# Altium PCB 4k-bias-board.PcbDoc
Units mil, origin at the board's own origin, x right, y up, seen from the top; angles counter-clockwise.
Board outline 2000 x 2000 mil, 2 copper layers (Top Layer, Bottom Layer); 30 components, 37 nets, 128 pads, 8 vias.
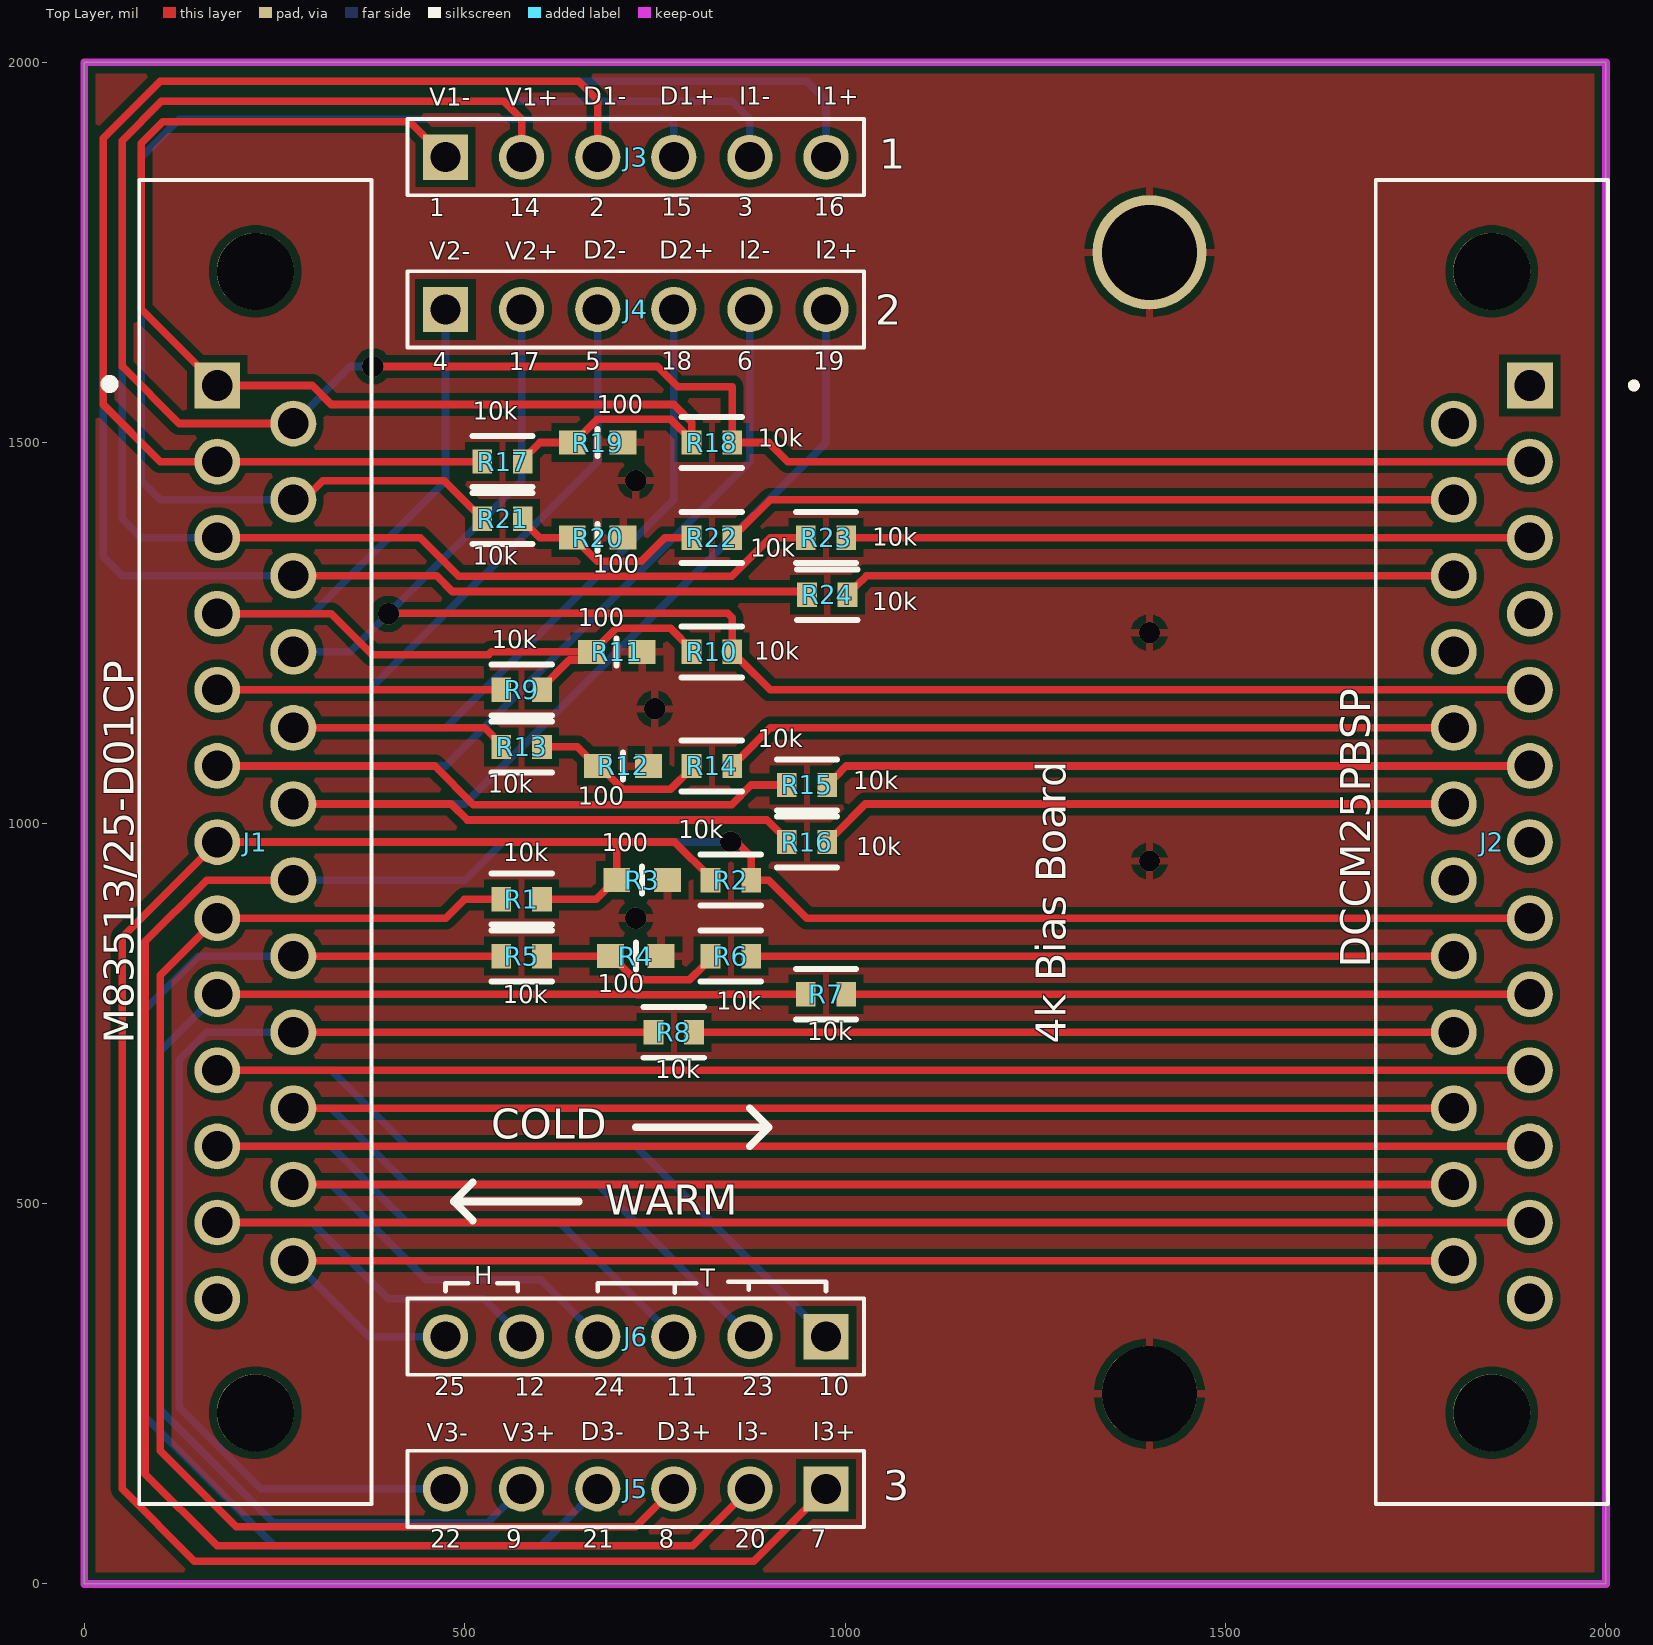
[diagram p0: Top Layer view]
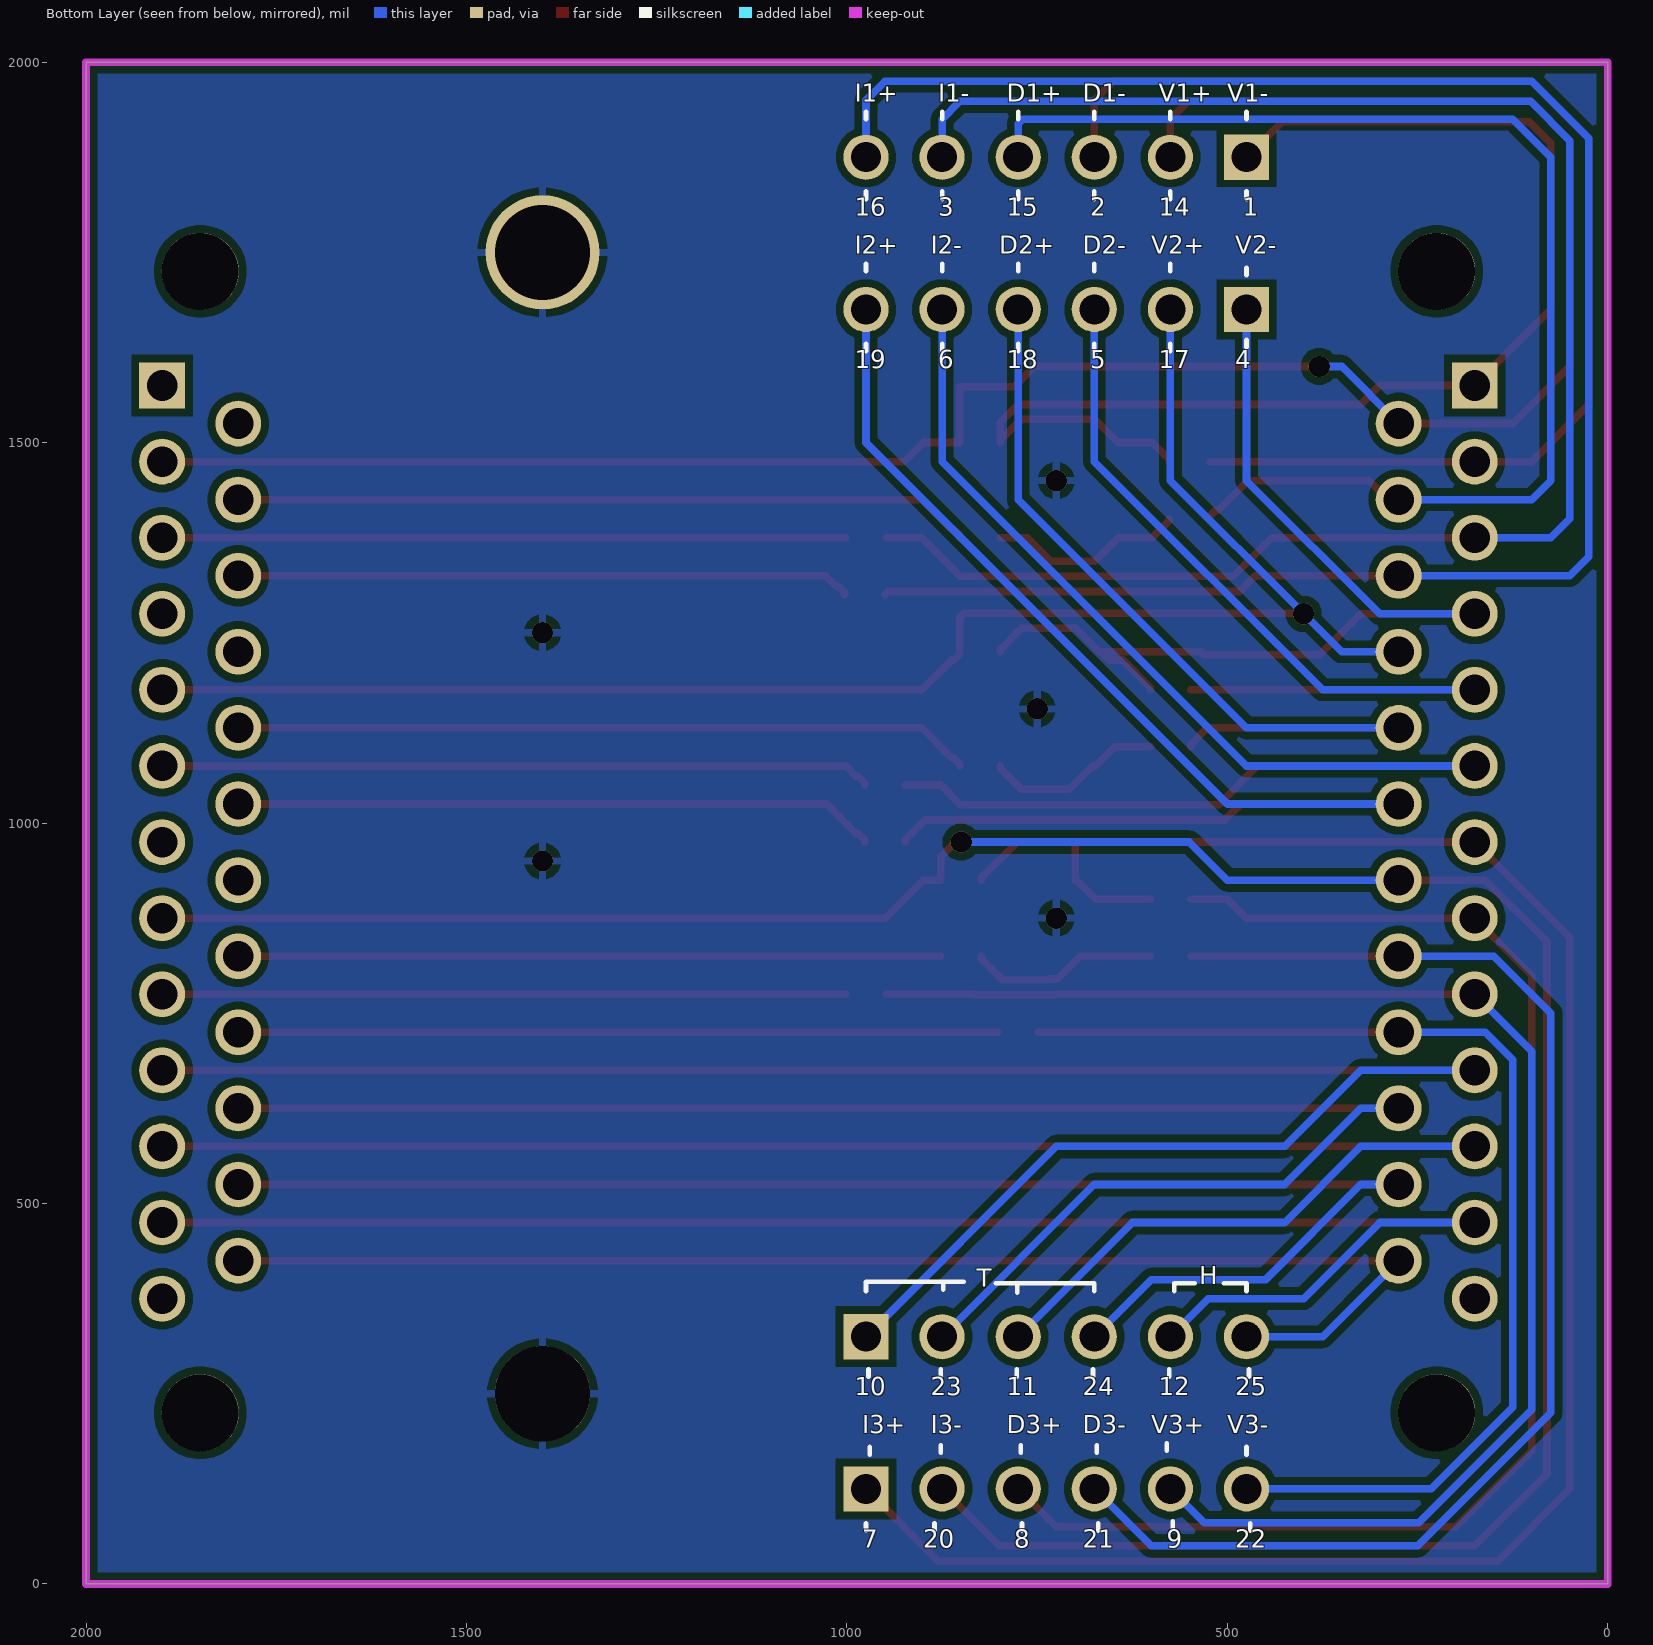
[diagram p1: Bottom Layer view, seen from below]
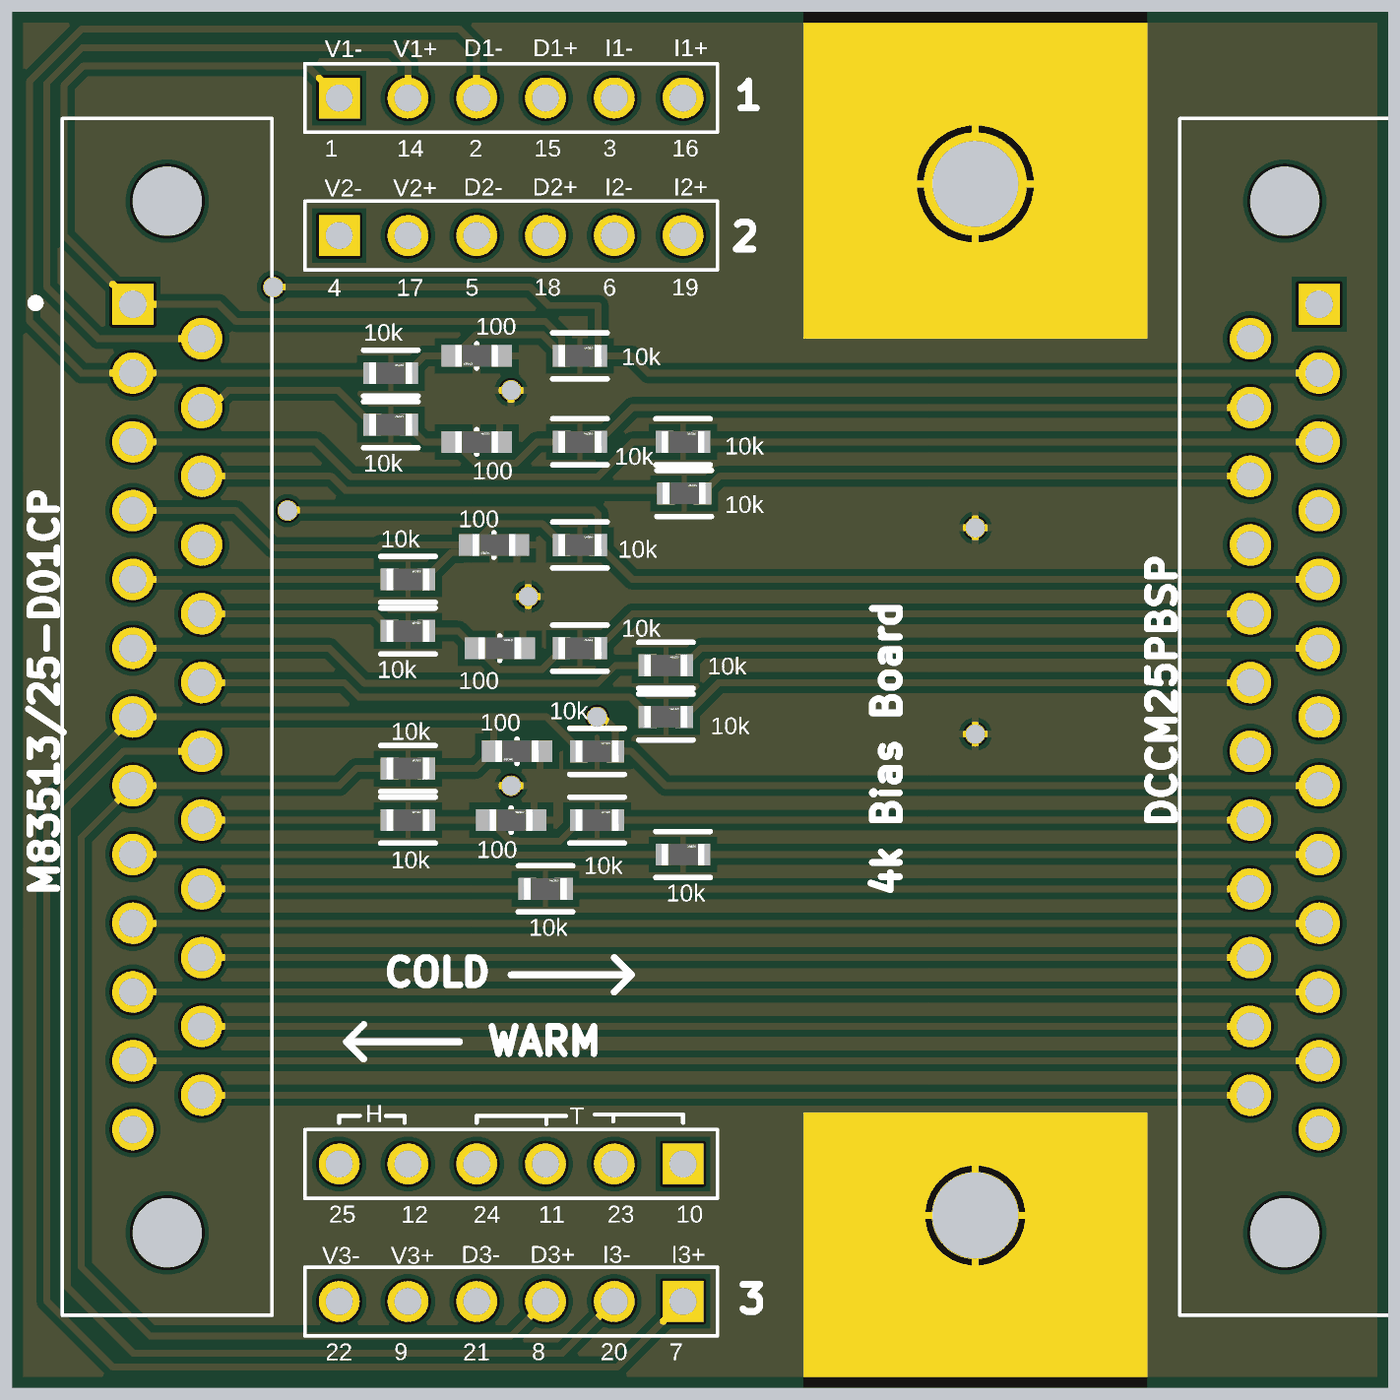
[diagram p2: 3D render of the assembled board from above, using the file's embedded part models]

## Layer stack, top to bottom
Top Solder: solder mask 0.4, Solder Resist, Dk 3.5
Top Layer: signal copper 1.4
Dielectric 1: dielectric 12.6, FR-4, Dk 4.8
Bottom Layer: signal copper 1.4
Bottom Solder: solder mask 0.4, Solder Resist, Dk 3.5

## Board outline
0,0 0,2000 2000,2000 2000,0

## Design rules (kind name [scope] priority, off if disabled: settings)
Clearance [All] p1: gap=10 ignorepadtopadclearanceinfootprint=FALSE except(0: Arc-Hole Track-Hole SMDPad-Hole THPad-Hole Via-Hole Fill-Hole Poly-Hole Region-Hole Text-Hole)
PolygonConnect [All] p1: connectstyle=Relief reliefconductorwidth=10 reliefentries=4 polygonreliefangle="90 Angle" airgapwidth=10
RoutingVias [All] p1: holewidth=28 width=50 viastyle="Through Hole" minholewidth=28 minwidth=50 maxholewidth=28 maxwidth=50
SolderMaskExpansion [All] p1: expansion=4 istentingtop=FALSE
Width [All] p1: maxlimit=10 minlimit=10 preferedwidth=10
30 further rules are at their usual default settings.

## Components (designator, comment, footprint, x,y, rotation, side; value= is the part's Value field where it differs from the comment)
J1 "M83513/25-D01CP" BEL_M83513/25-D01CP 225,975 r90 top
J2 "DCCM25PBSP" BEL_DCCM25PBSP 1850,975 r270 top
J3 "6 pos header" "6 pin header" 475,1875 r0 top
J4 "6 pos header" "6 pin header" 475,1675 r0 top
J5 "6 pos header" "6 pin header" 975,125 r180 top
J6 "6 pos header" "6 pin header" 975,325 r180 top
R1 "RC0603FR-0710KL" FP-RC0603-0_55-IPC_C 575,900 r0 top
R2 "RC0603FR-0710KL" FP-RC0603-0_55-IPC_C 850,925 r0 top
R3 "RC0603FR-07100RL" FP-RC0603-0_55-MFG 733.46,925 r180 top
R4 "RC0603FR-07100RL" FP-RC0603-0_55-MFG 725,825 r0 top
R5 "RC0603FR-0710KL" FP-RC0603-0_55-IPC_C 575,825 r0 top
R6 "RC0603FR-0710KL" FP-RC0603-0_55-IPC_C 850,825 r0 top
R7 "RC0603FR-0710KL" FP-RC0603-0_55-IPC_C 975,775 r0 top
R8 "RC0603FR-0710KL" FP-RC0603-0_55-IPC_C 775,725 r0 top
R9 "RC0603FR-0710KL" FP-RC0603-0_55-IPC_C 575,1175 r0 top
R10 "RC0603FR-0710KL" FP-RC0603-0_55-IPC_C 825,1225 r0 top
R11 "RC0603FR-07100RL" FP-RC0603-0_55-MFG 700,1225 r180 top
R12 "RC0603FR-07100RL" FP-RC0603-0_55-MFG 708.46,1075 r0 top
R13 "RC0603FR-0710KL" FP-RC0603-0_55-IPC_C 575,1100 r0 top
R14 "RC0603FR-0710KL" FP-RC0603-0_55-IPC_C 825,1075 r0 top
R15 "RC0603FR-0710KL" FP-RC0603-0_55-IPC_C 950,1050 r0 top
R16 "RC0603FR-0710KL" FP-RC0603-0_55-IPC_C 950,975 r0 top
R17 "RC0603FR-0710KL" FP-RC0603-0_55-IPC_C 550,1475 r0 top
R18 "RC0603FR-0710KL" FP-RC0603-0_55-IPC_C 825,1500 r0 top
R19 "RC0603FR-07100RL" FP-RC0603-0_55-MFG 675,1500 r180 top
R20 "RC0603FR-07100RL" FP-RC0603-0_55-MFG 675,1375 r0 top
R21 "RC0603FR-0710KL" FP-RC0603-0_55-IPC_C 550,1400 r0 top
R22 "RC0603FR-0710KL" FP-RC0603-0_55-IPC_C 825,1375 r0 top
R23 "RC0603FR-0710KL" FP-RC0603-0_55-IPC_C 975,1375 r0 top
R24 "RC0603FR-0710KL" FP-RC0603-0_55-IPC_C 976.64,1300 r0 top

## Footprints (in the part's own frame and the unit in brackets; to place one, negate y for a bottom-side part, rotate by r counter-clockwise, add the part's x,y. Pads: shape width x height; smd on the part's side, far side on the other; paste and mask are expansions set on the pad)
"6 pin header" [mm]
  rect 1.508x1.508 hole 1: 1(0,0)
  round 1.508 hole 1: 2(2.54,0) 3(5.08,0) 4(7.62,0) 5(10.16,0) 6(12.7,0)
  silkscreen extent -1.27,-1.27 13.97,1.27
BEL_DCCM25PBSP [mm]
  rect 1.53x1.53 hole 1.02: 1(-15.24,1.27)
  round 1.53 hole 1.02: 2(-12.7,1.27) 3(-10.16,1.27) 4(-7.62,1.27) 5(-5.08,1.27) 6(-2.54,1.27) 7(0,1.27) 8(2.54,1.27) 9(5.08,1.27) 10(7.62,1.27) 11(10.16,1.27) 12(12.7,1.27) 13(15.24,1.27) 14(-13.97,-1.27) 15(-11.43,-1.27) 16(-8.89,-1.27) 17(-6.35,-1.27) 18(-3.81,-1.27) 19(-1.27,-1.27) 20(1.27,-1.27) 21(3.81,-1.27) 22(6.35,-1.27) 23(8.89,-1.27) 24(11.43,-1.27) 25(13.97,-1.27)
  round 2.57 hole 2.57 unplated: ""(-19.05,0) ""(19.05,0)
  silkscreen extent -22.1,-3.88 22.1,4.84
BEL_M83513/25-D01CP [mm]
  rect 1.53x1.53 hole 1.02: 1(15.24,1.27)
  round 1.53 hole 1.02: 2(12.7,1.27) 3(10.16,1.27) 4(7.62,1.27) 5(5.08,1.27) 6(2.54,1.27) 7(0,1.27) 8(-2.54,1.27) 9(-5.08,1.27) 10(-7.62,1.27) 11(-10.16,1.27) 12(-12.7,1.27) 13(-15.24,1.27) 14(13.97,-1.27) 15(11.43,-1.27) 16(8.89,-1.27) 17(6.35,-1.27) 18(3.81,-1.27) 19(1.27,-1.27) 20(-1.27,-1.27) 21(-3.81,-1.27) 22(-6.35,-1.27) 23(-8.89,-1.27) 24(-11.43,-1.27) 25(-13.97,-1.27)
  round 2.57 hole 2.57 unplated: ""(-19.05,0) ""(19.05,0)
  silkscreen extent -22.1,-3.88 22.1,5.01
FP-RC0603-0_55-IPC_C [mil]
  rect 25.93x31.97 smd paste+0 mask+0: 1(-26.64,0) 2(26.64,0)
  silkscreen extent -40,-33 40,33, body extent -44,-22 44,22, height 10
FP-RC0603-0_55-MFG [mm]
  rect 0.9x0.8 smd paste+0 mask+0: 1(-0.85,0) 2(0.85,0)
  silkscreen extent 0,-0.45 0,0.45, body extent -1.4,-0.55 1.4,0.55, height 0.25

## Part data
J1: "MIL-DTL-83513 PCB Mounted Connector", Package=None, Availability=Unavailable, MP=M83513/25-D01CP, Price=None
J2: "Commercial PCB Mount Connector", Package=None, Check_prices=https://www.snapeda.com/parts/DCCM25PBSP/Cinch%20Connectors/view-part/4621471/?ref=eda, Digi-Key_Part_Number=116-1298-ND, MF="Cinch Connectivity Solutions", MP=DCCM25PBSP, Purchase-URL=https://pricing.snapeda.com/search/part/DCCM25PBSP/?ref=eda, SnapEDA_Link=https://www.snapeda.com/parts/DCCM25PBSP/Cinch%20Connectors/view-part/4621471/?ref=snap
J3 J4 J5 J6: "CONN HEADER VERT 6POS 2.54MM - MTA100 Series", Manufacturer_Part_Number=1755532, Supplier Part Number 1=A19433-ND, Built_By=EMA_Kyle, Copyright="Copyright (C) 2018 Accelerated Designs. All rights reserved", RefDes=RefDes, SourceLibrary=Phoenix_Contact_2018-12-18, Supplier 1=Digi-Key, Type=DEV, Vendor="Phoenix Contact"
R1 R2 R5 R6 R7 R8 R9 R10 R13 R14 R15 R16 R17 R18 R21 R22 R23 R24: library part CMP-2100-03664-2, "RES 10K OHM 1% 1/10W 0603", Case Code (Imperial)=0603, Case Code (Metric)=1608, Max Operating Temperature=155°C, Max Power Dissipation=100mW, Min Operating Temperature=-55°C, Resistance=10kR, Resistance Tolerance=1%, Resistor Type="Thick Film", Temperature Coefficient=100ppm/°C, Voltage Rating=75V, Voltage Rating (DC)=50V, Case/Package=0603, Construction=Rectangular, Depth=0.8mm, Features="Moisture Resistant", Height=0.45mm, Lead Free="Lead Free", Lead Pitch=0.3mm, Length=1.6mm, Military Standard=Not, Number of Pins=2, Number of Terminations=2, Packaging="Tape and Reel", Power Rating=100mW, RoHS Compliant=Yes, Series=RC, Size Code=0603, Termination=SMD/SMT, Tolerance=1%, Weight=7.1E-05oz, Width=0.8mm
R3 R4 R11 R12 R19 R20: library part CMP-2100-03663-2, Case Code (Imperial)=0603, Max Operating Temperature=155°C, Min Operating Temperature=-55°C, Power Rating=100mW, Resistance=100Ω, Temperature Coefficient=100ppm/°C, Tolerance=1%, Voltage Rating=50V, Case Code (Metric)=0603, Case/Package=0603, Composition="Thick Film", Depth=800µm, Height=450µm, Lead Free="Lead Free", Length=1.6mm, Military Standard=Not, NexarPartId=55402879, Number of Pins=2, Packaging="Tape & Reel", REACH SVHC=Unknown, RoHS=Compliant, Schedule B="8533210045, 8533210045", Termination=SMD/SMT, Voltage Rating (DC)=50V, Width=800µm

## Free pads (board coordinates)
  round 125 hole 125 paste-99999 mask-99999: 2(1400,250)
  round 150 hole 125: 3(1400,1750)

## Via types
v1: diameter 28, hole 28, Top Layer to Bottom Layer, 8 vias

## Nets (pads, with @x,y where several pads share a name; then routed paths per layer and width w, separated by ;. In a path a pad name is that pad's centre, name@x,y a point inside that pad or via, vN(x,y) a via of type N, cw(c..) or ccw(c..) an arc to the next point about the centre after c; other vN are vias at no path point)
GND: pad.2 pad.3 R3.1 R4.2 R11.1 R12.2 R19.1 R20.2
  other v1: 725,875 1400,950 750,1150 1400,1250 725,1450
NetJ1_1: J1.1 J3.1 R17.2 R18.1 R19.2 | length 1719
  Top Layer w10: J3.1 428.28,1921.72 103.28,1921.72 75,1893.43 75,1675 J1.1 300,1575 325,1550 775,1550 798.36,1526.64 R18.1@798.36,1503.02 ; R17.2 576.64,1478.02 598.62,1500 R19.2 643.5,1500 674.25,1530.75 770.63,1530.75 R18.1@798.36,1503.02 ; R18.1 R18.1@798.36,1503.02
NetJ1_2: J1.2 J3.3 R17.1 | length 1645.8
  Top Layer w10: R17.1 J1.2 100,1475 25,1550 25,1900 100,1975 650,1975 675,1950 J3.3
NetJ1_3: J1.3 J3.5 R23.1 | length 2353.5
  Top Layer w10: J1.3 441.63,1375 492.38,1324.25 851.06,1324.25 901.81,1375 R23.1
  Bottom Layer w10: J1.3 75,1375 50,1400 50,1896.72 101.64,1948.36 851.64,1948.36 875,1925 J3.5
NetJ1_4: J1.4 J4.1 R9.2 R10.1 R11.2 | length 1359.5
  Top Layer w10: J1.4 325,1275 379,1221 531.4,1221 535.4,1225 R11.2 ; R9.2 601.64,1178.02 637.87,1214.25 655.79,1214.25 R11.2 ; R10.1 798.36,1228.02 770.63,1255.75 699.25,1255.75 668.5,1225 R11.2
  Bottom Layer w10: J1.4 300,1275 475,1450 J4.1
NetJ1_5: J1.5 J4.3 R9.1 | length 1197.6
  Top Layer w10: J1.5 R9.1
  Bottom Layer w10: J1.5 375,1175 675,1475 J4.3
NetJ1_6: J1.6 J4.5 R15.1 | length 1845.7
  Top Layer w10: J1.6 460.75,1075 511.49,1024.25 851.06,1024.25 876.81,1050 R15.1
  Bottom Layer w10: J1.6 475,1075 875,1475 J4.5
NetJ1_7: J1.7 J5.1 R1.2 R2.1 R3.2 | length 2735
  Top Layer w10: R1.2 673.03,900 698.03,925 R3.2 700,975 ; R2.1 823.36,928.02 776.38,975 700,975 ; J5.1 880,30 145,30 50,125 50,850 J1.7 700,975
NetJ1_8: J1.8 J5.3 R1.1 | length 1851.9
  Top Layer w10: R1.1 500,900 475,875 J1.8 100,800 100,175 200,75 725,75 J5.3
NetJ1_9: J1.9 J5.5 R7.1 | length 1906.2
  Top Layer w10: J1.9 725.5,775 726.25,774.25 832.95,774.25 833.69,775 R7.1
  Bottom Layer w10: J1.9 100,700 100,228.96 248.64,80.31 530.31,80.31 J5.5
NetJ1_10: J1.10 J2.10 J6.1 | length 2670
  Top Layer w10: J1.10 J2.10
  Bottom Layer w10: J1.10 325,675 425,575 725,575 J6.1
NetJ1_11: J1.11 J2.11 J6.3 | length 2453.6
  Top Layer w10: J1.11 J2.11 J2.11@1925,575
  Bottom Layer w10: J1.11 325,575 425,475 625,475 J6.3
NetJ1_12: J1.12 J2.12 J6.5 | length 2212.1
  Top Layer w10: J1.12 J2.12 J2.12@1925,475
  Bottom Layer w10: J1.12 300,475 400,375 525,375 J6.5
NetJ1_14: J1.14 J2.2 J3.2 R18.2 | length 2909.7
  Top Layer w10: J1.14 125,1525 50,1600 50,1896.72 101.64,1948.36 551.64,1948.36 575,1925 J3.2 ; v1(379.29,1600) 753.28,1600 779.93,1573.36 851.64,1573.36 R18.2 900,1500 925,1475 J2.2
  Bottom Layer w10: J1.14 350,1600 v1(379.29,1600)
NetJ1_15: J1.15 J3.4 R21.1 | length 1683.8
  Top Layer w10: J1.15 288.59,1425 313.59,1450 473.36,1450 512.37,1410.99 515.39,1410.99 523.36,1403.02 R21.1
  Bottom Layer w10: J1.15 100,1425 75,1450 75,1875 125,1925 769.14,1925 775,1919.14 J3.4
NetJ1_16: J1.16 J3.6 R24.1 | length 2562.1
  Top Layer w10: J1.16 463.34,1325 484.09,1304.25 945.75,1304.25 R24.1
  Bottom Layer w10: J1.16 50,1325 25,1350 25,1900 100,1975 950,1975 975,1950 J3.6
NetJ1_17: J1.17 J2.5 J4.2 R10.2 | length 2188.3
  Top Layer w10: v1(400,1275) 400.75,1275.75 845.78,1275.75 851.64,1269.89 R10.2 851.64,1221.98 859.61,1214.01 862.63,1214.01 901.64,1175 J2.5
  Bottom Layer w10: J1.17 350,1225 v1(400,1275) 575,1450 J4.2
NetJ1_18: J1.18 J4.4 R13.1 | length 1159.7
  Top Layer w10: J1.18 526.38,1125 548.36,1103.02 R13.1
  Bottom Layer w10: J1.18 475,1125 775,1425 J4.4
NetJ1_19: J1.19 J4.6 R16.1 | length 1742.6
  Top Layer w10: J1.19 482.46,1025 503.46,1004 897.38,1004 923.36,978.02 R16.1
  Bottom Layer w10: J1.19 500,1025 975,1500 J4.6
NetJ1_20: J1.20 J2.8 J5.2 R2.2 | length 3498.1
  Top Layer w10: J1.20 161.19,925 80,843.81 80,145 175,50 800,50 J5.2 ; v1(850,975) 853.44,971.56 861.07,971.56 876.64,955.99 R2.2 900,925 950,875 J2.8
  Bottom Layer w10: J1.20 500,925 550,975 v1(850,975)
NetJ1_21: J1.21 J5.4 R5.1 | length 1733
  Top Layer w10: J1.21 R5.1
  Bottom Layer w10: J1.21 150,825 75,750 75,225 250,50 600,50 J5.4
NetJ1_22: J1.22 J5.6 R8.1 | length 1489.3
  Top Layer w10: J1.22 R8.1
  Bottom Layer w10: J1.22 161.19,725 125,688.81 125,232.24 232.24,125 J5.6
NetJ1_23: J1.23 J2.23 J6.2 | length 2274.3
  Top Layer w10: J1.23 J2.23 J2.23@1825,625
  Bottom Layer w10: J1.23 325,625 425,525 675,525 J6.2
NetJ1_24: J1.24 J2.24 J6.4 | length 2032.8
  Top Layer w10: J1.24 J2.24 J2.24@1825,525
  Bottom Layer w10: J1.24 325,525 450,400 600,400 J6.4
NetJ1_25: J1.25 J2.25 J6.6 | length 1766.4
  Top Layer w10: J1.25 J2.25
  Bottom Layer w10: J1.25 375,325 J6.6
NetJ2_3: J2.3 R23.2 | length 898.4
  Top Layer w10: R23.2 J2.3
NetJ2_6: J2.6 R15.2 | length 935.5
  Top Layer w10: R15.2 976.64,1053.02 984.61,1060.99 987.63,1060.99 1001.64,1075 J2.6
NetJ2_9: J2.9 R7.2 | length 898.4
  Top Layer w10: R7.2 J2.9
NetJ2_15: J2.15 R22.2 | length 970.8
  Top Layer w10: R22.2 851.64,1378.02 859.61,1385.99 862.63,1385.99 901.64,1425 J2.15
NetJ2_16: J2.16 R24.2 | length 808.8
  Top Layer w10: R24.2 1003.28,1303.02 1011.25,1310.99 1014.27,1310.99 1028.28,1325 J2.16
NetJ2_18: J2.18 R14.2 | length 982.2
  Top Layer w10: R14.2 851.64,1078.02 859.61,1085.99 862.63,1085.99 901.64,1125 J2.18 J2.18@1800,1136.41
NetJ2_19: J2.19 R16.2 | length 845.8
  Top Layer w10: R16.2 976.64,978.02 984.61,985.99 987.63,985.99 1026.64,1025 J2.19
NetJ2_21: J2.21 R6.2 | length 923.4
  Top Layer w10: R6.2 J2.21
NetJ2_22: J2.22 R8.2 | length 998.4
  Top Layer w10: R8.2 J2.22
NetR4_1: R4.1 R5.2 R6.1 | length 249
  Top Layer w10: R5.2 R4.1 693.5,825 723.5,795 733.79,795 734.53,794.25 795.63,794.25 815.39,814.01 823.36,821.98 R6.1
NetR12_1: R12.1 R13.2 R14.1 | length 234.3
  Top Layer w10: R13.2 648.03,1100 673.03,1075 R12.1 676.97,1075 707.72,1044.25 770.63,1044.25 798.36,1071.98 R14.1
NetR20_1: R20.1 R21.2 R22.1 | length 259.3
  Top Layer w10: R21.2 576.64,1396.98 598.62,1375 R20.1 643.5,1375 674.25,1344.25 732.39,1344.25 763.14,1375 R22.1
pads on no net: J1. J1.13 J2. J2.1 J2.4 J2.7 J2.13 J2.14 J2.17 J2.20

## Polygon pours and split planes (outlines as drawn)
GND on Top Layer "NONET_L02_P-001" (solid, pour order 0): 0,0 2000,0 2000,2000 0,2000
GND on Bottom Layer "NONET_L02_P-001" (solid, pour order 1): 0,0 0,2000 2000,2000 2000,0

## Keep-outs
Keep-Out Layer:
  the board outline again, w10

## Silkscreen, mask and mechanical layers (free items; w line width, h text height)
Top Overlay:
  lines w6: 475,385 475,395 505,395 ; 543,395 570,395 570,385 ; 675,385 675,395 ; 676.25,395 703.25,395 ; 705.25,395 804.75,395 ; 776.5,383 776.5,393 ; 846.5,397 873.5,397 873.5,387 ; 875.5,397 975,397 ; 975,385 975,395
  lines w10: 510.56,477.68 485.56,502.68 ; 510.56,527.68 485.56,502.68 ; 650,502.68 485.56,502.68 ; 725,600 900,600 ; 875,575 900,600 ; 875,625 900,600
  text "D1-" at 656.26,1935.88 h40
  text "D1+" at 756.26,1935.88 h40
  text "I1-" at 861.26,1935.88 h40
  text "I1+" at 961.26,1935.88 h40
  text "V1-" at 453.77,1934.55 h40
  text "V1+" at 553.77,1934.55 h40
  text "1" at 1045,1860 h39.37
  text "1" at 453.74,1789.55 h40
  text "14" at 558.74,1789.55 h40
  text "2" at 663.7,1789.55 h40
  text "15" at 758.74,1789.98 h40
  text "3" at 858.74,1789.98 h40
  text "16" at 958.74,1789.98 h40
  text "D2-" at 655.91,1733.58 h40
  text "D2+" at 755.91,1733.58 h40
  text "I2-" at 860.91,1733.58 h40
  text "I2+" at 960.91,1733.58 h40
  text "V2-" at 453.42,1732.25 h40
  text "V2+" at 553.42,1732.25 h40
  text "2" at 1040,1655 h39.37
  text "5" at 658.39,1587.69 h40
  text "18" at 758.39,1587.69 h40
  text "6" at 858.39,1587.69 h40
  text "19" at 958.39,1587.69 h40
  text "4" at 458.39,1587.25 h40
  text "17" at 558.39,1587.25 h40
  text "100" at 673.64,1530.84 h40
  text "10k" at 510.57,1521.82 h40
  text "10k" at 885.57,1486.82 h40
  text "10k" at 1035.57,1356.82 h40
  text "10k" at 875.57,1341.82 h40
  text "10k" at 510.57,1331.82 h40
  text "100" at 668.64,1320.84 h40
  text "10k" at 1035.57,1271.82 h40
  text "100" at 648.64,1250.84 h40
  text "10k" at 535.57,1221.82 h40
  text "10k" at 880.57,1206.82 h40
  text "10k" at 885.57,1091.82 h40
  text "10k" at 1010.57,1036.82 h40
  text "10k" at 530.57,1031.82 h40
  text "100" at 648.64,1015.84 h40
  text "10k" at 780.57,971.82 h40
  text "100" at 680,954.99 h40
  text "10k" at 1015,949.99 h40
  text "10k" at 550.57,941.82 h40
  text "DCCM25PBSP" at 1690,810 h39.37 r90
  text "100" at 675,769.99 h40
  text "10k" at 550,754.99 h40
  text "10k" at 830.57,746.82 h40
  text "M83513/25-D01CP" at 65,710 h39.37 r90
  text "4k Bias Board" at 1290,710 h39.37 r90
  text "10k" at 950.57,706.82 h40
  text "10k" at 750.57,656.82 h40
  text "COLD" at 535,585 h39.37
  text "WARM" at 685,485 h39.37
  text "H" at 513,386 h40
  text "T" at 810,383 h40
  text "25" at 460,239.99 h40
  text "12" at 565.04,239.56 h40
  text "24" at 670,239.56 h40
  text "11" at 765.04,239.56 h40
  text "23" at 865,239.99 h40
  text "10" at 965.04,239.99 h40
  text "D3-" at 652.56,181.32 h40
  text "D3+" at 752.56,181.32 h40
  text "I3-" at 857.56,181.32 h40
  text "I3+" at 957.56,181.32 h40
  text "V3-" at 450.07,179.99 h40
  text "V3+" at 550.07,179.99 h40
  text "3" at 1050,110 h39.37
  text "22" at 455,39.56 h40
  text "9" at 555.04,39.99 h40
  text "21" at 655,39.56 h40
  text "8" at 755.04,39.99 h40
  text "20" at 855,39.99 h40
  text "7" at 955.04,39.56 h40
Bottom Overlay:
  lines w6: 470,70 470,80 ; 471.68,272.25 471.68,282.25 ; 475,170 475,180 ; 475,385 475,395 505,395 ; 475,1625 475,1635 ; 475,1720 475,1730 ; 475,1820 475,1830 ; 475,1925 475,1935 ; 543,395 570,395 570,385 ; 571.82,72.47 571.82,82.47 ; 575,1620 575,1630 ; 575,1725 575,1735 ; 575,1820 575,1830 ; 575,1925 575,1935 ; 576.68,272.25 576.68,282.25 ; 580,175 580,185 ; 670,70 670,80 ; 671.68,172.25 671.68,182.25 ; 675,385 675,395 ; 675,1620 675,1630 ; 675,1725 675,1735 ; 675,1820 675,1830 ; 675,1925 675,1935 ; 676.25,395 703.25,395 ; 676.68,272.25 676.68,282.25 ; 705.25,395 804.75,395 ; 770,70 770,80 ; 771.68,172.25 771.68,182.25 ; 775,1620 775,1630 ; 775,1725 775,1735 ; 775,1820 775,1830 ; 775,1925 775,1935 ; 776.5,383 776.5,393 ; 776.68,272.25 776.68,282.25 ; 846.5,397 873.5,397 873.5,387 ; 875,1620 875,1630 ; 875,1725 875,1735 ; 875,1820 875,1830 ; 875,1925 875,1935 ; 875.5,397 975,397 ; 876.68,172.25 876.68,182.25 ; 876.68,272.25 876.68,282.25 ; 885,70 885,80 ; 970,170 970,180 ; 971.68,272.25 971.68,282.25 ; 975,70 975,80 ; 975,385 975,395 ; 975,1620 975,1630 ; 975,1725 975,1735 ; 975,1820 975,1830 ; 975,1925 975,1935
  text "V1-" at 500,1940 h40
  text "V1+" at 590,1940 h40
  text "D1-" at 690,1940 h40
  text "D1+" at 790,1940 h40
  text "I1-" at 880,1940 h40
  text "I1+" at 990,1940 h40
  text "1" at 480,1790 h40
  text "14" at 590,1790 h40
  text "2" at 680.03,1790 h40
  text "15" at 790,1789.99 h40
  text "3" at 880,1789.99 h40
  text "16" at 990,1789.99 h40
  text "V2-" at 490,1740 h40
  text "V2+" at 600,1740 h40
  text "D2-" at 690,1740 h40
  text "D2+" at 800,1740 h40
  text "I2-" at 890,1740 h40
  text "I2+" at 990,1740 h40
  text "4" at 490,1590 h40
  text "17" at 590,1590 h40
  text "5" at 680,1589.99 h40
  text "18" at 790,1589.99 h40
  text "6" at 880,1589.99 h40
  text "19" at 990,1589.99 h40
  text "H" at 513,386 h40
  text "T" at 810,383 h40
  text "25" at 490,239.99 h40
  text "12" at 590,240 h40
  text "24" at 690.03,240 h40
  text "11" at 790,240 h40
  text "23" at 890,239.99 h40
  text "10" at 990,239.99 h40
  text "V3-" at 500,189.99 h40
  text "V3+" at 600,189.99 h40
  text "D3-" at 690,189.99 h40
  text "D3+" at 790,189.99 h40
  text "I3-" at 890,189.99 h40
  text "I3+" at 980,189.99 h40
  text "22" at 490.03,40 h40
  text "9" at 580,39.99 h40
  text "21" at 690.03,40 h40
  text "8" at 780,39.99 h40
  text "20" at 900,39.99 h40
  text "7" at 980,40 h40
Top Solder:
  circle w75: c1400,250 r37.5
  rectangle: 1150,1525 1650,2000
  rectangle: 1150,0 1650,400
Bottom Solder:
  circle w75: c1400,250 r37.5
  rectangle: 1150,0 1650,2000